# Altium PCB xc7z030_pwr.PcbDoc
Units mm, origin at the board's own origin, x right, y up, seen from the top; angles counter-clockwise.
Board outline 40.5 x 25.5 mm, 2 copper layers (Top Layer, Bottom Layer); 62 components, 35 nets, 174 pads, 191 vias.
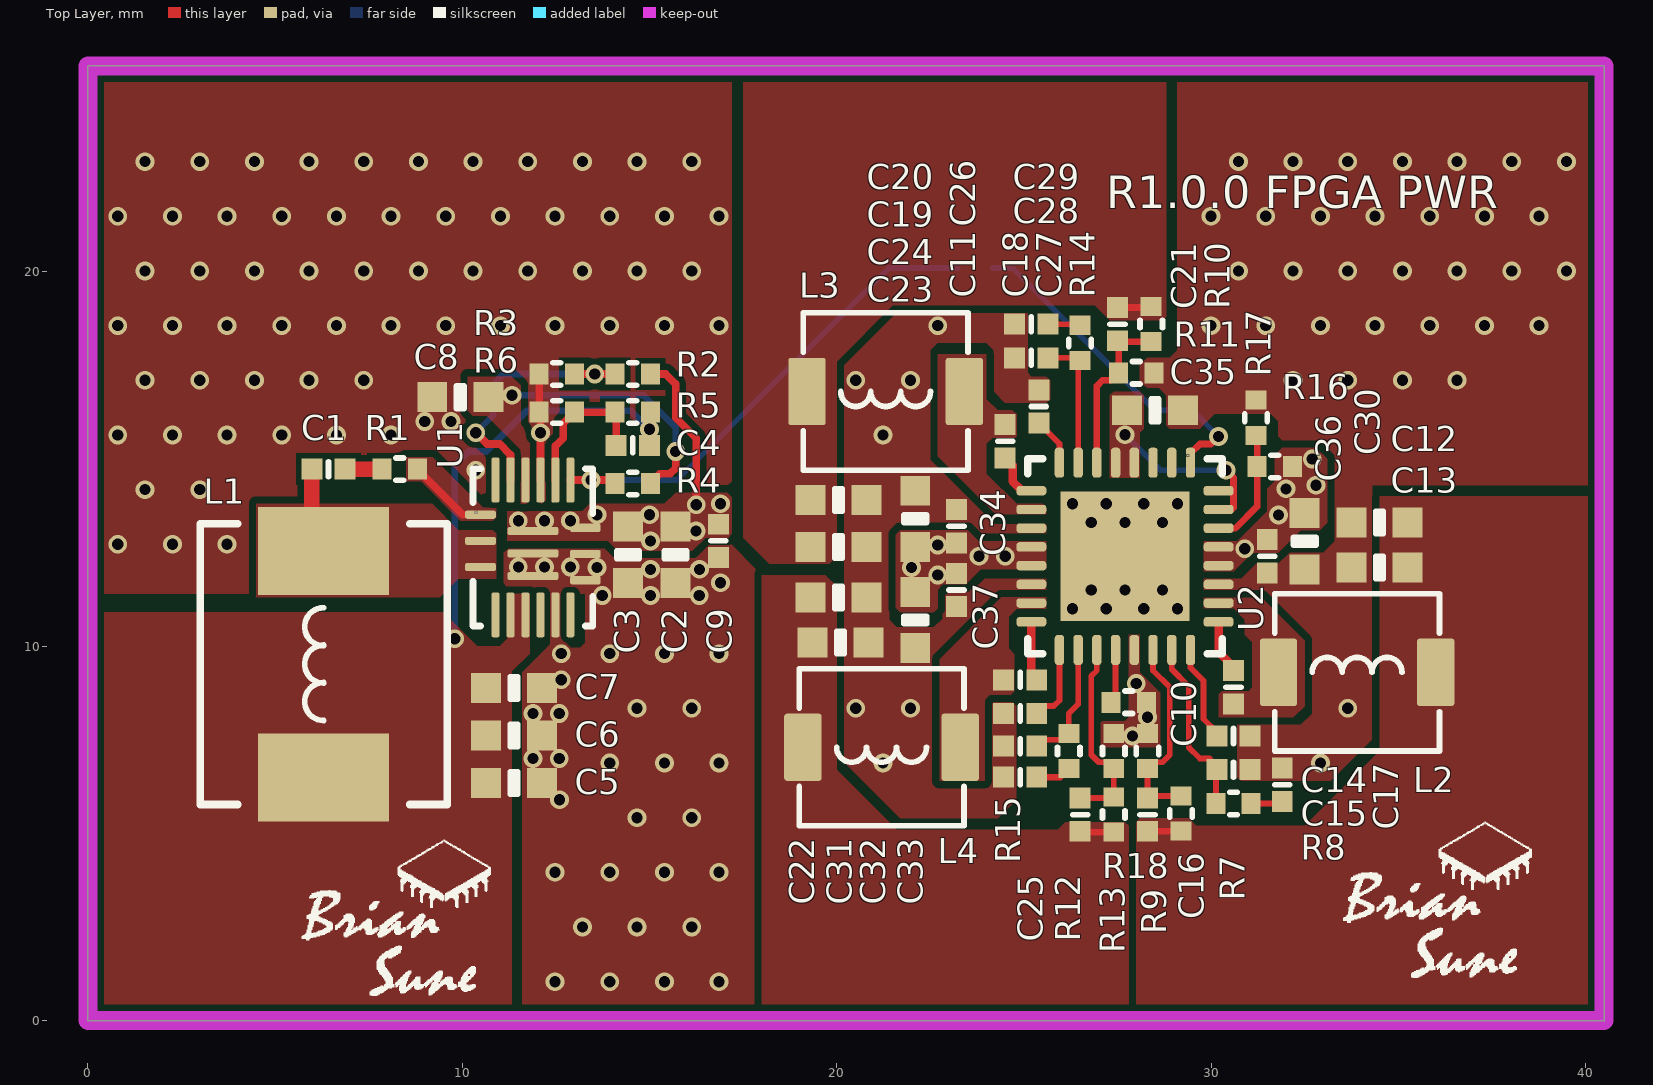
[diagram p0: Top Layer view]
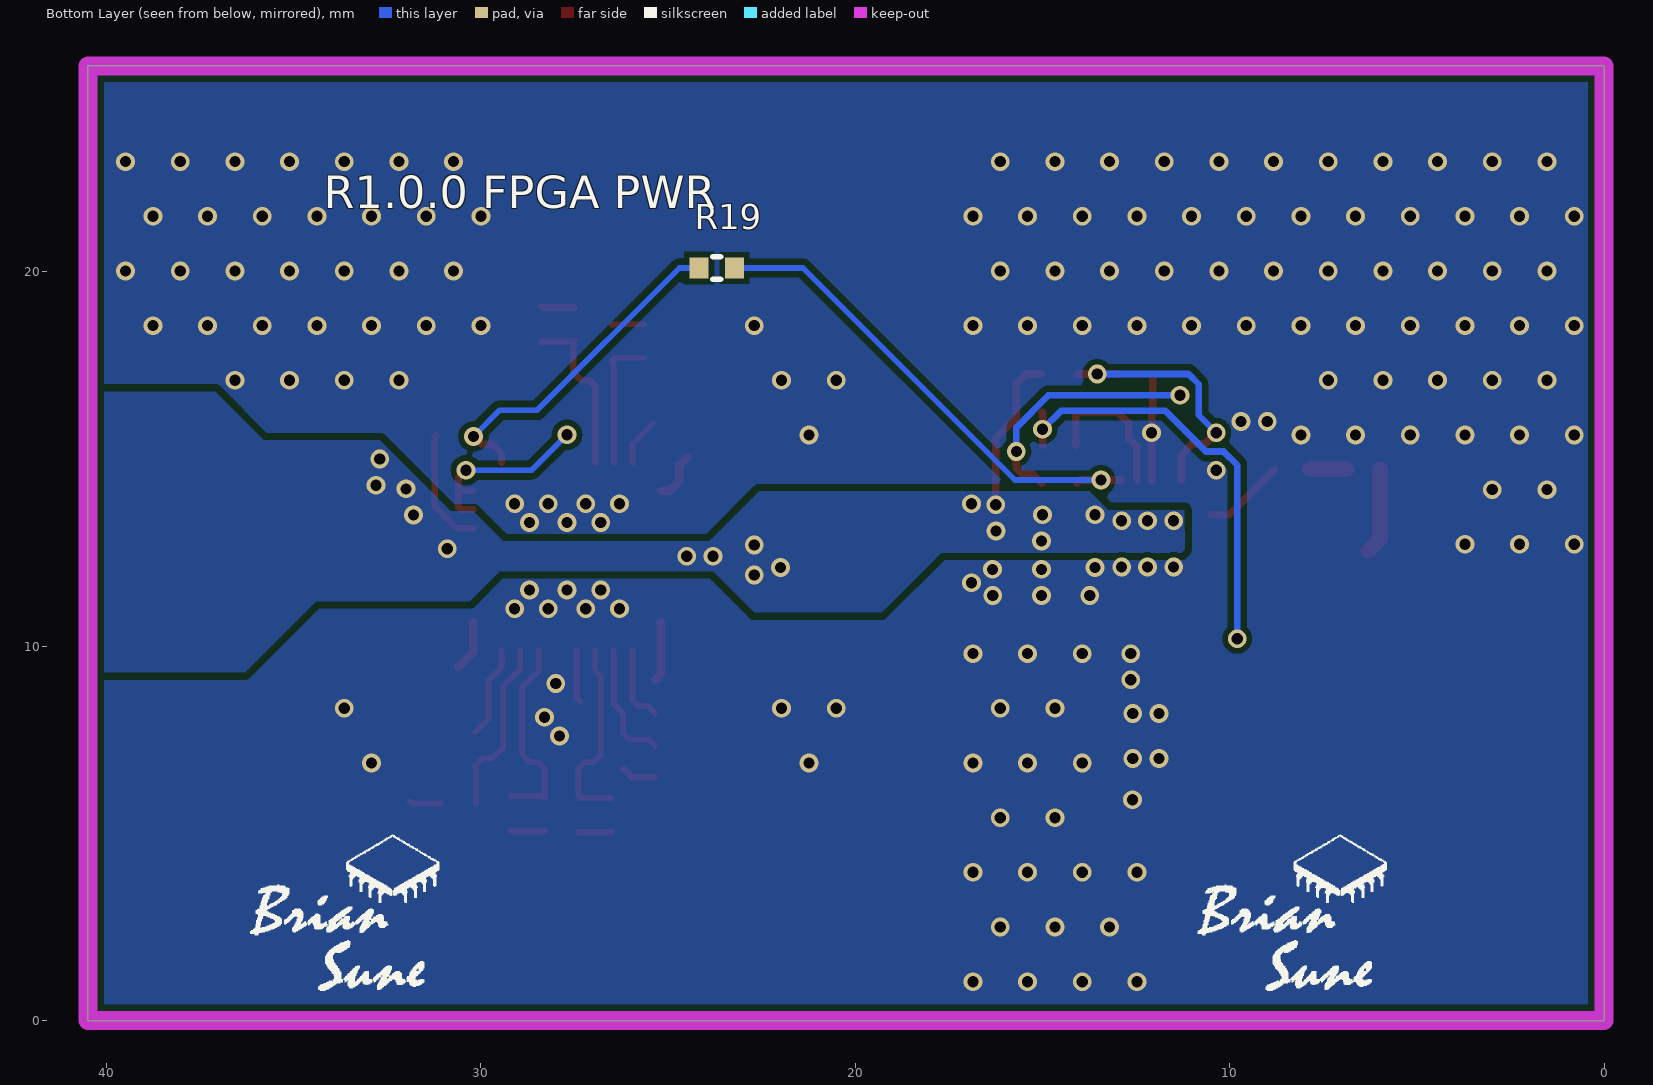
[diagram p1: Bottom Layer view, seen from below]
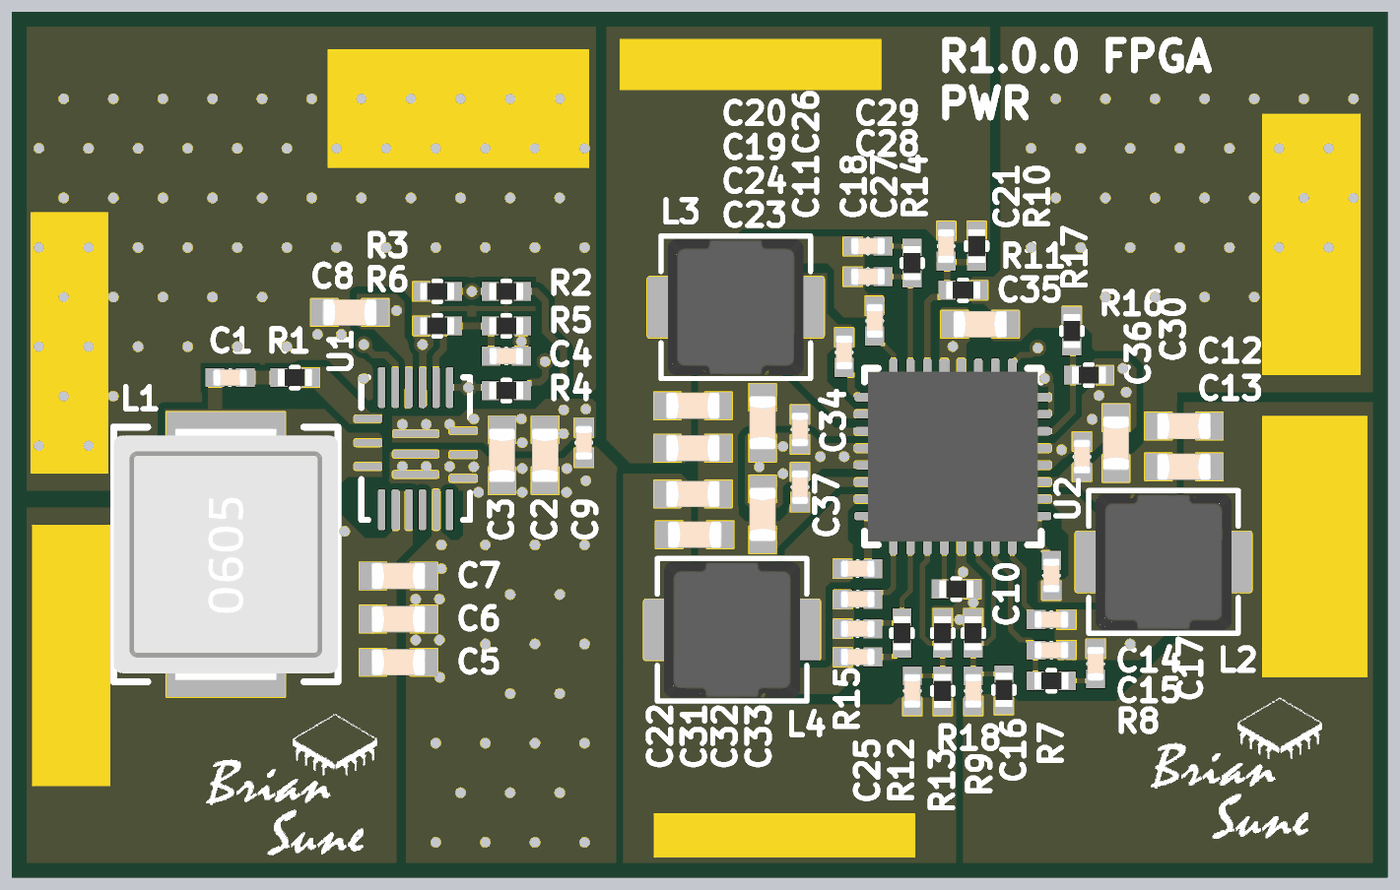
[diagram p2: 3D render of the assembled board from above, using the file's embedded part models]

## Layer stack, top to bottom
Top Solder: solder mask 0.0102, Solder Resist, Dk 3.5
Top Layer: signal copper 0.0356
Dielectric 1: dielectric 0.32, FR-4, Dk 4.8
Bottom Layer: signal copper 0.0356
Bottom Solder: solder mask 0.0102, Solder Resist, Dk 3.5

## Board outline
0,0 40.5,0 40.5,25.5 0,25.5

## Design rules (kind name [scope] priority, off if disabled: settings)
Clearance [All] p1: gap=0.152 ignorepadtopadclearanceinfootprint=FALSE except(0: Arc-Hole Track-Hole SMDPad-Hole THPad-Hole Via-Hole Fill-Hole Poly-Hole Region-Hole Text-Hole; 0.178: Arc-Poly Track-Poly; 0.203: SMDPad-Region THPad-Poly THPad-Region Fill-Poly Poly-Poly Poly-Region)
ComponentClearance [All] p1: gap=0.3 collisioncheckmode=3 verticalgap=0.3 showdistances=FALSE
DiffPairsRouting [All] p1: maxlimit=0.254 minlimit=0.152 mostfreqgap=0.203 toplayer_minwidth=0.152 toplayer_maxwidth=0.381 toplayer_prefwidth=0.203 bottomlayer_minwidth=0.152 bottomlayer_maxwidth=0.381 bottomlayer_prefwidth=0.203 maxuncoupledlength=12.7
Height [All] p1: minheight=0 maxheight=40 prefheight=12.7
HoleSize [All] p1: absolutevalues=TRUE maxlimit=6 minlimit=0.025 maxpercent=80.000 minpercent=20.000
HoleToHoleClearance [All] p1: gap=0.076 allowstackedmicrovias=TRUE
MinimumSolderMaskSliver [All] p1: minsoldermaskwidth=0.025
PlaneConnect [All] p1: planeconnectstyle=Direct reliefexpansion=0.508 reliefentries=4 reliefconductorwidth=0.254 reliefairgap=0.254
PolygonConnect [All] p1: connectstyle=Direct reliefconductorwidth=0.305 reliefentries=4 polygonreliefangle="90 Angle" airgapwidth=0.305
RoutingVias [All] p1: holewidth=0.4 width=0.6 viastyle="Through Hole" minholewidth=0.3 minwidth=0.5 maxholewidth=2.8 maxwidth=3
SilkToSilkClearance [All] p1: silktosilkclearance=0.076
SilkToSolderMaskClearance [IsPad] p1: minsilkscreentomaskgap=0.025 clearancetoexposedcopper=TRUE
SolderMaskExpansion [All] p1: expansion=0.025
Width [All] p1: maxlimit=1.016 minlimit=0.152 preferedwidth=0.254
21 further rules are at their usual default settings.

## Components (designator, comment, footprint, x,y, rotation, side; value= is the part's Value field where it differs from the comment)
C1 "220nF" 0402#1 6.428,14.727 r180 top
C2 "10uF" C0603 15.699,12.441 r90 top
C3 "10uF" C0603 14.429,12.441 r90 top
C4 "220pF" 0402#1 14.556,15.362 r0 top
C5 "47uF" C0603 11.381,6.345 r180 top
C6 "47uF" C0603 11.381,7.615 r180 top
C7 "47uF" C0603 11.381,8.885 r180 top
C8 "1uF" C0603 9.95,16.648 r0 top
C9 "100nF" 0402#1 16.842,12.811 r90 top
C10 "33nF" 0402#1 30.6,8.9 r270 top
C11 "10uF" C0603 22.1,10.7 r90 top
C12 "22uF" C0603 34.5,13.3 r0 top
C13 "22uF" C0603 34.5,12.1 r0 top
C14 "33nF" 0402#1 30.6,7.6 r180 top
C15 "22pF" 0402#1 30.6,6.7 r180 top
C16 "82pF" 0402#1 28.3,5.5 r270 top
C17 "3.3nF" 0402#1 31.9,6.3 r270 top
C18 "33nF" 0402#1 24.5,15.47 r90 top
C19 "22uF" C0603 20.05,12.65 r180 top
C20 "22uF" C0603 20.05,13.9 r180 top
C21 "22pF" 0402#1 27.5,18.6 r90 top
C22 "33nF" 0402#1 24.9,9.1 r180 top
C23 "22uF" C0603 20.1,10.1 r180 top
C24 "22uF" C0603 20.05,11.3 r180 top
C25 "22pF" 0402#1 26.505,5.5 r270 top
C26 "10uF" C0603 22.1,13.4 r270 top
C27 "33nF" 0402#1 25.4,16.4 r270 top
C28 "22pF" 0402#1 25.2,17.7 r0 top
C29 "2.2nF" 0402#1 25.2,18.6 r0 top
C30 "10uF" C0603 32.5,12.8 r90 top
C31 "33nF" 0402#1 24.9,8.2 r0 top
C32 "22pF" 0402#1 24.9,7.33 r0 top
C33 "2.2nF" 0402#1 24.9,6.5 r0 top
C34 "100nF" 0402#1 23.2,13.2 r90 top
C35 "1uF" C0603 28.5,16.3 r0 top
C36 "100nF" 0402#1 31.5,12.4 r270 top
C37 "100nF" 0402#1 23.2,11.5 r270 top
L1 "1uH" 0650SMD 6.301,9.52 r90 top
L2 "4u7H" 04x0SMD_P 33.9,9.3 r180 top
L3 "4u7H" 04x0SMD_P 21.309,16.8 r0 top
L4 "4u7H" 04x0SMD_P 21.2,7.3 r0 top
R1 "4R7" 0402#2 8.333,14.727 r0 top
R2 "150k" 0402#2 14.556,17.267 r180 top
R3 "20k" 0402#2 12.524,17.267 r0 top
R4 "100k" 0402#2 14.556,14.346 r180 top
R5 "13k7" 0402#2 14.556,16.251 r0 top
R6 "20k" 0402#2 12.524,16.251 r0 top
R7 "16k" 0402#2 29.2,5.53 r270 top
R8 "20k" 0402#2 30.6,5.8 r180 top
R9 "10k" 0402#2 28.3,7.2 r270 top
R10 "20k" 0402#2 28.4,18.6 r90 top
R11 "10k" 0402#2 28,17.3 r180 top
R12 "47k5" 0402#2 27.4,5.5 r270 top
R13 "10k" 0402#2 27.4,7.2 r270 top
R14 "33k2" 0402#2 26.5,18.1 r270 top
R15 "33k2" 0402#2 26.2,7.2 r90 top
R16 "73k2" 0402#2 31.7,14.8 r180 top
R17 "10k" 0402#2 31.2,16.1 r270 top
R18 "73k2" 0402#2 27.8,8.5 r0 top
R19 "0R" 0402#2 23.7,20.1 r0 bottom
U1 "MP8757GL" QFN21_3x4mm 11.889,12.636 r0 top
U2 "TPS65261" VQFN_1MM 27.7,12.4 r270 top

## Footprints (in the part's own frame and the unit in brackets; to place one, negate y for a bottom-side part, rotate by r counter-clockwise, add the part's x,y. Pads: shape width x height; smd on the part's side, far side on the other; paste and mask are expansions set on the pad)
04x0SMD_P [mm]
  rrect15% 1x1.8 smd: 1(-2.1,0) 2(2.1,0)
  silkscreen extent -2.2,-2.1 2.2,2.1, body extent -2,-2 2,2, height 1.91
0402#1 [mil]
  rect 22x22 smd: 1(-17.5,0) 2(17.5,0)
  silkscreen extent 0,-8 0,8, body extent -20,-10 20,10, height 20
0402#2 [mil]
  rect 20x22 smd: 1(-18.5,0) 2(18.5,0)
  silkscreen extent -4,-12 4,12, body extent -20,-10 20,10, height 14
0650SMD [mm]
  rect 2.35x3.5 smd: 1(-3.025,0) 2(3.025,0)
  silkscreen extent -3.75,-3.3 3.75,3.3, body extent -3.7,-3.3 3.7,3.3, height 5.05
C0603 [mm]
  rect 0.8x0.8 smd: 1(-0.75,0) 2(0.75,0)
  silkscreen extent -0.1,-0.3 0.1,0.3, body extent -0.8,-0.4 0.8,0.4, height 0.81
QFN21_3x4mm [mm]
  rrect50% 0.82x0.22 smd: 1(-1.4,0.875) 2(-1.4,0.175) 3(-1.4,-0.525) 10(1.4,-0.875) 11(1.4,-0.175) 12(1.4,0.525)
  rrect50% 0.22x1.2 smd: 4(-1,-1.8) 5(-0.6,-1.8) 6(-0.2,-1.8) 7(0.2,-1.8) 8(0.6,-1.8) 9(1,-1.8) 13(1,1.8) 14(0.6,1.8) 15(0.2,1.8) 16(-0.2,1.8) 17(-0.6,1.8) 18(-1,1.8)
  rrect50% 1.357x0.22 smd: 19(0,0.44) 20(0,-0.16) 21(0,-0.76)
  silkscreen extent -1.6,-2.1 1.6,2.1, body extent -1.5,-2 1.5,2, height 1
VQFN_1MM [mm]
  rrect65% 0.8x0.25 smd: 1(-2.5,1.75) 2(-2.5,1.25) 3(-2.5,0.75) 4(-2.5,0.25) 5(-2.5,-0.25) 6(-2.5,-0.75) 7(-2.5,-1.25) 8(-2.5,-1.75) 17(2.5,-1.75) 18(2.5,-1.25) 19(2.5,-0.75) 20(2.5,-0.25) 21(2.5,0.25) 22(2.5,0.75) 23(2.5,1.25) 24(2.5,1.75)
  rrect65% 0.25x0.8 smd: 9(-1.75,-2.5) 10(-1.25,-2.5) 11(-0.75,-2.5) 12(-0.25,-2.5) 13(0.25,-2.5) 14(0.75,-2.5) 15(1.25,-2.5) 16(1.75,-2.5) 25(1.75,2.5) 26(1.25,2.5) 27(0.75,2.5) 28(0.25,2.5) 29(-0.25,2.5) 30(-0.75,2.5) 31(-1.25,2.5) 32(-1.75,2.5)
  rect 3.45x3.45 smd: 33(0,0)
  silkscreen extent -2.6,-2.6 2.6,2.6, body extent -2.5,-2.5 2.5,2.5, height 1

## Part data
C1: library part OBEIDUN_220nF, "0402 220nF 224K  50V X7R", Mfr.=OBEIDUN, Mfr. No=224K, ComponentLink1Description=taobao, ComponentLink1URL=https://detail.tmall.com/item.htm?abbucket=11&id=610639075445&rn=c45cf579a90ea6adc9060b093ff18dcd&skuId=4463795831944&spm=a312a.7700824.w4011-22147617817.53.51a47d1eimiUpx, Price=0.03
C2 C3 C11 C26 C30: library part OUDEIBUN_10uF_50V, "OUDEIBUN / 50V 10% 106K X5R", Mfr.=OUDEIBUN, Mfr. No=106, ComponentLink1Description=taobao, ComponentLink1URL=https://detail.tmall.com/item.htm?abbucket=11&id=610884231672&rn=bfecce7903ee26d41e055cbdf2d2e6eb&spm=a1z10.3-b.w4011-22147617817.28.ed547d1efUUngR&skuId=4463564134689, Price=0.2
C4: library part OBEIDUN_220pF, "OBEIDUN 0402 221J COG 50V", Mfr.=OBEIDUN, Mfr. No=221J, ComponentLink1Description=taobao, ComponentLink1URL=https://detail.tmall.com/item.htm?_u=l10quk0k03aa&id=608895064566&spm=a1z09.2.0.0.10c82e8dL5BzWq&skuId=4453182071791, Price=0.02
C5 C6 C7: library part OUDEIBUN_47uF_6V3, "OUDEIBUN / 6V3 20% 476K X5R", Mfr.=OUDEIBUN, Mfr. No=476, ComponentLink1Description=taobao, ComponentLink1URL=https://detail.tmall.com/item.htm?abbucket=13&id=610150176421&rn=481b48c6c534cdc180661e2f6a596c7b&skuId=4296160929116&spm=a1z10.3-b.w4011-22147617817.57.14877d1eTKWJED, Price=0.3
C8 C35: library part OUDEIBUN_1uF, "0603 1UF 16V 10% 105K X5R", Mfr.=OUDEIBUN, Mfr. No=105K, ComponentLink1Description=taobao, ComponentLink1URL=https://detail.tmall.com/item.htm?abbucket=11&id=610883455002&rn=96f7b0dde361d4c3b62eb7ab1af2da05&skuId=4292434832790&spm=a1z10.3-b.w4011-22147617817.48.46817d1eD6aiZS, Price=0.03
C9 C34 C36 C37: library part OBEIDUN_100nF, "0402 100NF 104K  50V X7R", Mfr.=OBEIDUN, Mfr. No=104K, ComponentLink1Description=taobao, ComponentLink1URL=https://detail.tmall.com/item.htm?abbucket=11&id=610169377419&rn=af8cc3c313be083494688299e412f071&skuId=4460562122099&spm=a1z10.3-b.w4011-22147617817.47.43b27d1eVfSLTc, Price=0.03
C10 C14 C18 C22 C27 C31: library part OBEIDUN_33nF, "0402 33nF 333K 16V X7R", Mfr.=OBEIDUN, Mfr. No=333K, ComponentLink1Description=taobao, ComponentLink1URL=https://detail.tmall.com/item.htm?abbucket=11&id=610643367827&rn=485ffb871bba3336ec56bdf6e40ebf1b&skuId=4293224337085&spm=a1z10.3-b.w4011-22147617817.69.91e77d1e9KkI7E, Price=0.03
C12 C13 C19 C20 C23 C24: library part OUDEIBUN_22uF, "OUDEIBUN / 25V 10% 226K X5R", Mfr.=OUDEIBUN, Mfr. No=226, ComponentLink1Description=taobao, ComponentLink1URL=https://detail.tmall.com/item.htm?abbucket=11&id=610150156146&rn=59afea97bc42016507be0d5449395d39&spm=a1z10.3-b.w4011-22147617817.29.2b4e7d1e4hXUjj&skuId=4292454384286, Price=0.6
C15 C21 C25 C28 C32: library part OBEIDUN_22pF, "0402 22pF 50V 20J COG NPO", Mfr.=OBEIDUN, Mfr. No=220J, ComponentLink1Description=taobao, ComponentLink1URL=https://detail.tmall.com/item.htm?abbucket=13&id=609430597564&rn=a1c8a15a7d6b2f90e38db74694a5b856&spm=a1z10.3-b.w4011-22147617817.40.15037d1etTZYEz&skuId=4280449596223, Price=0.02
C16: library part OBEIDUN_82pF, "82pF 50V 620J COG NPO", Mfr.=OBEIDUN, Mfr. No=820J, ComponentLink1Description=taobao, ComponentLink1URL=https://detail.tmall.com/item.htm?abbucket=11&id=609672674869&rn=c1fa653a33d4336f9e9c3c352a7aff81&spm=a1z10.3-b.w4011-22147617817.32.3e3c7d1e2qr17J&skuId=4284174813108, Price=0.02
C17: library part RAINPOLE_3n3F, "RAINPOLE 0402 3.3nF 5% 50V NPO", Mfr.=RAINPOLE, Mfr. No=332J, ComponentLink1Description=taobao, ComponentLink1URL=https://detail.tmall.com/item.htm?abbucket=11&id=577480004200&rn=e81fc7a7675914d6e9f82eba46a12cbb&skuId=3986690931936&spm=a1z10.3-b-s.w4011-12364813249.37.6d9c1ed6XWLE9d, Price=0.04
C29 C33: library part RAINPOLE_2n2F, "RAINPOLE 0402 2.2nF 5% 50V NPO", Mfr.=RAINPOLE, Mfr. No=222J, ComponentLink1Description=taobao, ComponentLink1URL=https://detail.tmall.com/item.htm?abbucket=11&id=577480004200&rn=e81fc7a7675914d6e9f82eba46a12cbb&skuId=3986690931935&spm=a1z10.3-b-s.w4011-12364813249.37.6d9c1ed6XWLE9d, Price=0.04
L1: library part L0650_1UH, "WHC0650 7*7*5MM 1R0 13A 6m5Ohm", Mfr.=Yiruisen, Mfr. No=WHC0650, ComponentLink1Description=taobao, ComponentLink1URL=https://detail.tmall.com/item.htm?id=627357573507&spm=a1z0d.6639537/tb.1997196601.4.a32d7484NrXeB3&skuId=4625833335696, Price=0.27
L2 L3 L4: library part L0430_4u7H, "4.6mmx4.1mm (LxH) DCDC Inductor SMD", Mfr.=Yiruisen, Mfr. No=WNR4030_4R7, ComponentLink1Description=taobao, ComponentLink1URL=https://detail.tmall.com/item.htm?_u=210quk0k00bf&id=627418333252&spm=a1z09.2.0.0.414e2e8dD7jcDS&skuId=4626433327929, Price=0.13
R1: library part OUDEIBUN_4R7, "OUDEIBUN / 4R7 1% 1/16W", Mfr.=OUDEIBUN, ComponentLink1Description=taobao, ComponentLink1URL=https://detail.tmall.com/item.htm?abbucket=13&id=609078818699&rn=feeb7488c21e87fd67651ea25af79abc&spm=a1z10.3-b.w4011-22147617817.124.4d347d1eCJcv5w&skuId=4447048518756, Mfr. No=4R7, Price=0.02
R2: library part OUDEIBUN_150k, "OUDEIBUN / 1% 150k", Mfr.=UNIOHM, ComponentLink1Description=taobao, ComponentLink1URL=https://detail.tmall.com/item.htm?abbucket=11&id=608928061564&rn=4c37b34fc9dccdc2648173b890fd7863&spm=a1z10.3-b.w4011-22147617817.39.76cf7d1eaF9LC8&skuId=4280827589226, Mfr. No=150k, Price=0.02
R3 R6 R8 R10: library part OUDEIBUN_20k, "OUDEIBUN / 20k 1% 1/16W", Mfr.=OUDEIBUN, ComponentLink1Description=taobao, ComponentLink1URL=https://detail.tmall.com/item.htm?_u=310quk0k3cbb&id=656218957556&skuId=4912158475127&spm=a1z09.2.0.0.d5442e8dvaKsoM, Mfr. No=20k, Price=0.02
R4: library part OUDEIBUN_100k, "OUDEIBUN / 1% 100k", Mfr.=UNIOHM, ComponentLink1Description=taobao, ComponentLink1URL=https://detail.tmall.com/item.htm?abbucket=11&id=608928061564&rn=6cabffb4bef601fc6d0198b0cb480a08&spm=a1z10.3-b.w4011-22147617817.51.20d47d1eFEZrXW&skuId=4280827589222, Mfr. No=100k, Price=0.02
R5: library part OUDEIBUN_13k7, "OUDEIBUN / 13k7 1% 1/16W", Mfr.=OUDEIBUN, ComponentLink1Description=taobao, ComponentLink1URL=https://detail.tmall.com/item.htm?_u=o10quk0kf7a9&id=655765932456&spm=a1z09.2.0.0.570c2e8dmKgpe8, Mfr. No=13k7, Price=0.02
R7: library part OUDEIBUN_16k, "OUDEIBUN / 16k 1% 1/16W", Mfr.=OUDEIBUN, ComponentLink1Description=taobao, ComponentLink1URL=https://detail.tmall.com/item.htm?abbucket=11&id=608846861852&rn=f3906b9a9f5d35fbf311e7100197937b&spm=a1z10.3-b.w4011-22147617817.42.3a057d1eN8EQT2&skuId=4279728581761, Mfr. No=16k, Price=0.02
R9 R11 R13 R17: library part UNIOHM_10k, "UNIOHM / 10K 1% 1/16W", Mfr.=UNIOHM, ComponentLink1Description=taobao, ComponentLink1URL=https://item.taobao.com/item.htm?spm=a1z09.2.0.0.570c2e8dmKgpe8&id=525633713781&_u=o10quk0k26e8, Mfr. No=10k, Price=0.012
R12: library part OUDEIBUN_47k5, "OUDEIBUN / 47k5 1% 1/16W", Mfr.=OUDEIBUN, ComponentLink1Description=taobao, ComponentLink1URL=https://detail.tmall.com/item.htm?abbucket=11&id=655773044079&rn=97d9fd7d3e40aac3ec20e0e4bb97f2bb&skuId=4907496518276&spm=a1z10.3-b.w4011-22147617817.21.41507d1eL5RGRn, Mfr. No=47k5, Price=0.02
R14 R15: library part OUDEIBUN_33k2, "OUDEIBUN / 33k2 1% 1/16W", Mfr.=OUDEIBUN, ComponentLink1Description=taobao, ComponentLink1URL=https://detail.tmall.com/item.htm?_u=o10quk0kba15&id=656995123026&skuId=4912165283327&spm=a1z09.2.0.0.570c2e8dmKgpe8, Mfr. No=33k2, Price=0.02
R16 R18: library part OUDEIBUN_73k2, "OUDEIBUN / 73k2 1% 1/16W", Mfr.=OUDEIBUN, ComponentLink1Description=taobao, ComponentLink1URL=https://detail.tmall.com/item.htm?abbucket=13&id=655776124899&rn=8c2a12cdcc93de56183387e142bb2639&spm=a1z10.3-b.w4011-22147617817.19.2f467d1e18LPyu&skuId=4738672061254, Mfr. No=73k2, Price=0.02
R19: library part OUDEIBUN_0R, "OUDEIBUN / 0R 1% 1/16W", Mfr.=OUDEIBUN, ComponentLink1Description=taobao, ComponentLink1URL=https://detail.tmall.com/item.htm?abbucket=11&id=609078082053&rn=dd22835191e181ef543cf6f0827e8de3&spm=a1z10.3-b.w4011-22147617817.40.1e787d1eBkSpf5&skuId=4447040574382, Mfr. No=0R, Price=0.02
U1: "High Efficiency, 7A, 18V / Synchronous, Step-Down Converter", Mfr.="Monolithic Power Systems", Mfr. No=MP8757GL-Z, ComponentLink1Description=taobao, ComponentLink1URL=https://item.taobao.com/item.htm?id=769936282235&skuId=5276685344264&spm=a1z0d.6639537/tb.1997196601.14.a32d7484BS3swO, Price=1.09
U2: library part TPS65261RHBR, "4.5-V to 18-V Input Voltage, 3-A/2-A/2-A Output Current / Triple Synchronous Step-Down Converter", Mfr.="Texas Instruments Incorporated", ComponentLink1Description=taobao, ComponentLink1URL=https://item.taobao.com/item.htm?spm=a1z0d.6639537/tb.1997196601.4.24877484nqp7mV&id=750148428314, Mfr. No=TPS65261RHBR, Price=4.4

## Via types
v1: diameter 0.5, hole 0.3, Top Layer to Bottom Layer, tented both sides, 191 vias

## Nets (pads, with @x,y where several pads share a name; then routed paths per layer and width w, separated by ;. In a path a pad name is that pad's centre, name@x,y a point inside that pad or via, vN(x,y) a via of type N, cw(c..) or ccw(c..) an arc to the next point about the centre after c; other vN are vias at no path point)
+1V5: C12.2 C13.2 C16.2 L2.1 R7.2 | length 0.9
  Top Layer w0.178: C16.2 R7.2@29.195,5.055
+1V8: C19.2 C20.2 C21.2 L3.1 R10.2 | length 0.9
  Top Layer w0.178: C21.2 28.375,19.044 R10.2
+3V3: C23.2 C24.2 C25.2 L4.1 R12.2 | length 0.9
  Top Layer w0.178: C25.2 26.53,5.03 R12.2
+12V: C2.2 C3.2 C9.2 C11.2 C26.2 C30.2 C34.1 C36.1 C37.1 R2.1 R16.1 U1.12 U1.19 U2.12 U2.13 U2.28 U2.29 | length 4.2
  Top Layer w0.203: R2.1 15.433,17.267 15.7,17 15.7,16.1 16.248,15.552 v1(16.248,13.776)
  other v1: 22.7,11.9 22,12.1 23.8,12.4 24.5,12.4 30.9,12.6 22.7,12.7 15.026,12.811 16.242,13.076 11.5,13.35 12.2,13.35 12.889,13.35 13.6,13.511 15.001,13.511 31.8,13.5 16.9,13.8 32,14.2 32.8,14.3 32.7,15
DC1V_O: C4.2 C5.2 C6.2 C7.2 L1.1 R5.2 U1.5 U1.6 | length 11.5
  Top Layer w0.203: C4.2 v1(15.001,15.794) 15.001,16.226 R5.2
  Bottom Layer w0.178: v1(9.8,10.2) 9.8,14.835 10.165,15.2 10.638,15.2 11.722,16.283 14.511,16.283 v1(15.001,15.794)
DC1V_SW: C1.2 L1.2 U1.2 U1.3 | length 2.3
  Top Layer w0.406: C1.2 5.984,12.862 L1.2
FPGA_DC_SIDE_EN: R19.2 U2.1 | length 9.1
  Top Layer w0.178: U2.1 29.45,15.15 29.7,15.4 30,15.4 v1(30.2,15.6)
  Bottom Layer w0.152: R19.2 24.7,20.1 28.5,16.3 29.5,16.3 v1(30.2,15.6)
GND: C2.1 C3.1 C5.1 C6.1 C7.1 C8.1 C9.1 C11.1 C12.1 C13.1 C14.1 C15.1 C17.1 C19.1 C20.1 C23.1 C24.1 C26.1 C27.1 C28.1 C29.1 C30.1 C31.1 C32.1 C33.1 C34.2 C35.2 C36.2 C37.2 R3.1 R6.1 R9.1 R11.1 R13.1 R17.1 R18.2 U1.8 U1.10 U1.11 U1.15 U1.20 U1.21 U2.11 U2.14 U2.21 U2.27 U2.33 | length 2.8
  Top Layer w0.203: R3.1 R6.1 12.089,16.216 v1(12.089,15.7) U1.15
  other v1: 12.48,1.04 13.94,1.04 15.4,1.04 16.86,1.04 13.21,2.5 14.67,2.5 16.13,2.5 12.48,3.96 13.94,3.96 15.4,3.96 16.86,3.96 14.67,5.42 16.13,5.42 12.6,5.9 13.94,6.88 15.4,6.88 16.86,6.88 21.24,6.88 32.92,6.88 11.889,7 12.589,7 27.9,7.6 28.3,8.1 11.889,8.2 12.589,8.2 14.67,8.34 16.13,8.34 20.51,8.34 21.97,8.34 33.65,8.34 28,9 12.645,9.1 12.645,9.8 13.94,9.8 15.4,9.8 16.86,9.8 26.3,11 27.2,11 28.2,11 29.1,11 13.739,11.35 15.026,11.35 16.331,11.35 26.8,11.5 27.7,11.5 28.7,11.5 16.9,11.691 15.026,12.05 16.337,12.05 11.5,12.111 12.2,12.111 12.889,12.111 13.6,12.1 0.8,12.72 2.26,12.72 3.72,12.72 26.8,13.3 27.7,13.3 28.7,13.3 26.3,13.8 27.2,13.8 28.2,13.8 29.1,13.8 1.53,14.18 2.99,14.18 10.362,14.7 0.8,15.64 2.26,15.64 3.72,15.64 5.18,15.64 6.64,15.64 8.1,15.64 21.24,15.64 9,16 9.7,16 1.53,17.1 2.99,17.1 4.45,17.1 5.91,17.1 7.37,17.1 20.51,17.1 21.97,17.1 32.19,17.1 33.65,17.1 35.11,17.1 36.57,17.1 0.8,18.56 2.26,18.56 3.72,18.56 5.18,18.56 6.64,18.56 8.1,18.56 9.56,18.56 11.02,18.56 12.48,18.56 13.94,18.56 15.4,18.56 16.86,18.56 22.7,18.56 30,18.56 31.46,18.56 32.92,18.56 34.38,18.56 35.84,18.56 37.3,18.56 38.76,18.56 1.53,20.02 2.99,20.02 4.45,20.02 5.91,20.02 7.37,20.02 8.83,20.02 10.29,20.02 11.75,20.02 13.21,20.02 14.67,20.02 16.13,20.02 30.73,20.02 32.19,20.02 33.65,20.02 35.11,20.02 36.57,20.02 38.03,20.02 39.49,20.02 0.8,21.48 2.26,21.48 3.72,21.48 5.18,21.48 6.64,21.48 8.1,21.48 9.56,21.48 11.02,21.48 12.48,21.48 13.94,21.48 15.4,21.48 16.86,21.48 30,21.48 31.46,21.48 32.92,21.48 34.38,21.48 35.84,21.48 37.3,21.48 38.76,21.48 1.53,22.94 2.99,22.94 4.45,22.94 5.91,22.94 7.37,22.94 8.83,22.94 10.29,22.94 11.75,22.94 13.21,22.94 14.67,22.94 16.13,22.94 30.73,22.94 32.19,22.94 33.65,22.94 35.11,22.94 36.57,22.94 38.03,22.94 39.49,22.94
NetC1_1: C1.1 R1.1 | length 1
  Top Layer w0.406: C1.1 R1.1
NetC4_1: C4.1 R5.1 R6.2 U1.14 | length 4
  Top Layer w0.203: U1.14 12.489,15.344 12.7,15.555 12.7,15.957 R6.2 R5.1 14.112,16.226 C4.1
NetC10_1: C10.1 U2.25 | length 1.4
  Top Layer w0.229: U2.25 30.2,9.845 C10.1@30.6,9.444
NetC10_2: C10.2 L2.2 U2.26
NetC14_2: C14.2 U2.24 | length 2.5
  Top Layer w0.152: U2.24 29.45,9.424 29.8,9.074 29.8,8.056 C14.2@30.156,7.7
NetC15_2: C15.2 R8.2 U2.23 | length 4.8
  Top Layer w0.152: U2.23 28.95,9.385 29.4,8.935 29.4,7.3 29.7,7 29.956,7 30.156,6.8 30.13,6.775 R8.2
NetC16_1: C16.1 R7.1 R9.2 U2.22 | length 5.4
  Top Layer w0.152: U2.22 28.45,9.35 28.9,8.9 28.9,7.1 28.7,6.9 28.47,6.9 R9.2 28.3,6 C16.1 28.356,6 R7.1
NetC17_2: C17.2 R8.1 | length 0.9
  Top Layer w0.152: R8.1 31.845,5.8 C17.2
NetC18_1: C18.1 U2.9 | length 1.3
  Top Layer w0.229: C18.1 24.7,14.825 24.7,14.4 24.95,14.15 U2.9
NetC18_2: C18.2 L3.2 U2.10
NetC21_1: C21.1 R10.1 R11.2 U2.6 | length 4.5
  Top Layer w0.178: U2.6 26.95,16.95 27.1,17.1 27.33,17.1 R11.2 27.53,18.125 C21.1@27.525,18.13 ; C21.1 C21.1@27.525,18.13 ; R10.1 C21.1@27.525,18.13
NetC22_1: C22.1 U2.16 | length 1.6
  Top Layer w0.229: U2.16 25.2,9.245 C22.1
NetC22_2: C22.2 L4.2 U2.15
NetC25_1: C25.1 R12.1 R13.2 U2.19 | length 5.3
  Top Layer w0.152: C25.1 27.375,5.944 R12.1 R13.2 27.23,6.9 27,6.9 26.8,7.1 26.8,9.2 26.95,9.35 U2.19
NetC27_2: C27.2 U2.8 | length 1.3
  Top Layer w0.152: C27.2 25.95,15.405 U2.8
NetC28_2: C28.2 R14.2 U2.7 | length 3.6
  Top Layer w0.152: C28.2 26.43,17.7 R14.2 26.45,17.58 U2.7
NetC29_2: C29.2 R14.1 | length 0.9
  Top Layer w0.152: C29.2 26.47,18.6 R14.1
NetC31_2: C31.2 U2.17 | length 2.1
  Top Layer w0.152: C31.2 25.545,8.4 25.8,8.4 25.95,8.55 U2.17
NetC32_2: C32.2 R15.2 U2.18 | length 3.3
  Top Layer w0.152: C32.2 25.514,7.5 26.03,7.5 R15.2 26.2,8.2 26.45,8.45 U2.18
NetC33_2: C33.2 R15.1 | length 1
  Top Layer w0.178: C33.2 25.97,6.5 R15.1
NetR1_2: R1.2 U1.1 | length 2.2
  Top Layer w0.203: R1.2 10.019,13.511 U1.1
NetR2_2: R2.2 R3.2 U1.17 | length 7.3
  Top Layer w0.203: v1(10.362,15.7) 10.662,15.4 11,15.4 11.289,15.111 U1.17 ; R3.2 v1(13.54,17.267) R2.2
  Bottom Layer w0.178: v1(10.362,15.7) 10.829,16.167 10.829,16.994 11.101,17.267 v1(13.54,17.267)
NetR16_2: R16.2 R17.2 U2.30 | length 3.2
  Top Layer w0.178: U2.30 30.65,13.15 31.23,13.73 R16.2 31.23,15.6 R17.2
NetR18_1: R18.1 U2.20 | length 1.4
  Top Layer w0.152: R18.1 27.45,8.62 U2.20
PG1V: R4.2 R19.1 U1.13 | length 13.4
  Top Layer w0.203: U1.13 v1(13.443,14.436) 13.996,14.436 R4.2
  Bottom Layer w0.152: v1(13.443,14.436) 15.736,14.436 21.4,20.1 R19.1
V7V: C35.1 U2.4 U2.5 U2.31 U2.32 | length 5
  Top Layer w0.178: U2.31 30.55,13.65 30.6,13.7 30.6,14.2 ; U2.32 30.55,14.15 30.6,14.2 ; v1(30.4,14.7) 30.6,14.5 30.6,14.2
  Bottom Layer w0.152: v1(27.7,15.644) 28.644,14.7 v1(30.4,14.7)
VCC: C8.2 R4.1 U1.16 | length 6.7
  Top Layer w0.203: R4.1 15.28,14.6 15.549,14.6 15.7,14.751 v1(15.7,15.2)
  Bottom Layer w0.178: v1(11.327,16.7) 14.842,16.7 15.7,15.842 v1(15.7,15.2)
pads on no net: U1.4 U1.7 U1.9 U1.18 U2.2 U2.3

## Polygon pours and split planes (outlines as drawn)
GND on Top Layer "GND_L01_P090" (solid, remove dead copper, pour order 90): 17.2,11.4 17.2,25.5 0,25.5 0,11.4
no net on Top Layer "Top Layer-No Net" (solid, pour order 88): 0,25.4
no net on Top Layer "Top Layer-No Net 1" (solid, pour order 86): 0,25.4
GND on Top Layer "Top Layer-GND" (solid, remove dead copper, pour order 84): 12.901,9.951 13.149,9.951 13.289,10.092 13.289,11.464 13.126,11.626 11.226,11.626 11.226,12.707 13.765,12.707 14.079,12.393 16.268,12.393 16.626,12.751 17.149,12.751 17.826,12.074 17.826,0.026 11.6,0.026 11.6,9.3 12.351,10.051 12.351,11.426 12.626,11.426 12.626,10.226
+1V8 on Top Layer "+1V8_L01_P077" (solid, remove dead copper, pour order 77): 17.5,25.5 28.8,25.5 28.8,18.8 28.7,18.7 27.3,18.7 26.9,19.1 21.5,19.1 20,17.6 20,12.4 19.8,12.2 18.2,12.2 17.5,12.9
+1V5 on Top Layer "+1V5_L01_P078" (solid, remove dead copper, pour order 78): 34.5,7.2 32.5,5.2 29.6,5.2 29.4,5.4 28.1,5.4 28,5.3 28,0 40.5,0 40.5,14 34.5,14
+3V3 on Top Layer "+3V3_L01_P076" (solid, remove dead copper, pour order 76): 21.6,5.1 25.9,5.1 26.1,5.3 27.7,5.3 27.8,5.2 27.8,0 18,0 18,11.9 19.7,11.9 20,11.6 20,6.7
V7V on Top Layer "V7V_L01_P063" (solid, remove dead copper, pour order 63): 27.3,14.5 27.3,16.7 27.4,16.8 28.1,16.8 28.2,16.7 28.2,15.8 28.1,15.7 28.1,14.5
GND on Top Layer "GND_L01_P065" (solid, remove dead copper, pour order 65): 27.8,10.3 27.8,8.1 27.7,8 27.1,8 27,7.9 27,7.4 27.1,7.3 28.6,7.3 28.7,7.4 28.7,8.7 28.1,9.3 28.1,10.3
GND on Top Layer "GND_L01_P079" (solid, remove dead copper, pour order 79): 28.9,17.7 29.1,17.9 29.1,25.5 40.5,25.5 40.5,14.3 34.3,14.3 34.3,7.5 33.2,6.4 30.8,6.4 30.7,6.5 30.7,7.9 32.4,7.9 32.7,8.2 32.7,10.2 31.8,11.1 31.4,11.5 29.8,11.5 29.8,11.8 30.8,11.8 31.2,12.2 31.8,12.2 32.1,12.5 33,12.5 33.3,12.8 33.3,15.1 32.9,15.5 31.9,15.5 31.8,15.6 31.8,16 31.6,16.2 30.1,16.2 29.7,15.8 28.9,15.8 28.8,15.9 28.8,16.7 28.6,16.9 28.2,16.9 28.1,17 28.1,17.5 28.3,17.7
+12V on Top Layer "+12V_L01_P068" (solid, remove dead copper, pour order 68): 29.8,12.8 30.7,12.8 31.5,13.6 31.5,14.2 31.7,14.4 31.7,15.1 31.9,15.3 32.8,15.3 33.1,15 33.1,13.3 32.9,13.1 32.4,13.1 31.8,12.5 31.1,12.5 30.6,12 29.8,12
NetC10_2 on Top Layer "NETC10_2_L01_P067" (solid, remove dead copper, pour order 67): 29.8,11.295 29.8,11.011 30.6,11.011 30.9,10.711 30.9,10.3 31.1,10.1 31.1,8.9 31,8.8 30.2,8.8 30.2,8.1 32.2,8.1 32.5,8.4 32.5,10.15 31.355,11.295
+12V on Top Layer "+12V_L01_P069" (solid, remove dead copper, pour order 69): 22.7,11.011 22.7,11.513 22.837,11.65 23.45,11.65 23.85,12.05 25.6,12.05 25.6,12.8 23.8,12.8 23.5,13.1 21.7,13.1 21.58,12.98 21.58,11.021 21.7,10.9 22.589,10.9
NetC22_2 on Top Layer "NETC22_2_L01_P073" (solid, remove dead copper, pour order 73): 24.6,9.938 24.75,9.788 24.75,8.794 24.656,8.7 24.094,8.7 23.95,8.555 23.95,6.4 22.75,6.4 22.75,9.65 24.4,11.3 25.6,11.3 25.6,11 24.817,11 24.6,10.783
GND on Top Layer "GND_L01_P081" (solid, remove dead copper, pour order 81): 25.6,16.5 25.7,16.6 25.7,17.1 25.6,17.2 25.2,17.2 25.1,17.3 25.1,18.9 21.6,18.9 20.2,17.5 20.2,6.9 21.7,5.4 24.3,5.4 24.8,5.9 24.8,8.4 24.7,8.5 24.2,8.5 24.1,8.4 24.1,6.3 24,6.2 22.7,6.2 22.545,6.355 22.545,9.545 24.5,11.5 25.6,11.5 25.6,11.8 23.95,11.8 23.65,11.5 23.05,11.5 22.837,11.287 22.837,10.737 22.6,10.5 21.6,10.5 21.4,10.7 21.4,13.076 21.58,13.256 23.595,13.256 23.84,13.01 25.6,13.01 25.6,13.256 24.22,13.256 22.776,14.7 22.5,14.976 22.5,17.9 22.7,18.1 24,18.1 24.2,17.9 24.2,16.8 24.5,16.5
NetC18_2 on Top Layer "NETC18_2_L01_P070" (solid, remove dead copper, pour order 70): 22.7,17.8 24,17.8 24,16.6 24.3,16.3 24.696,16.3 24.805,16.19 24.805,15.605 24.77,15.57 24.17,15.57 24,15.4 24,14.606 24.805,13.8 25.6,13.8 25.6,13.525 24.25,13.525 22.7,15.075
GND on Top Layer "GND_L01_P066" (solid, remove dead copper, pour order 66): 8.7,17.2 8.7,15.644 10.249,14.095 10.631,14.477 10.631,14.934 10.2,15.365 10.2,15.846 9.95,16.096 9.95,17.2
VCC on Top Layer "VCC_L01_P064" (solid, remove dead copper, pour order 64): 10.15,17.2 10.15,16.281 10.278,16.153 10.653,16.153 11.563,15.242 11.563,13.8 11.8,13.8 11.8,15.689 11.563,15.926 11.563,16.963 11.327,17.2
NetR1_2 on Top Layer "NETR1_2_L01_P062" (solid, remove dead copper, pour order 62): 8.5,15.044 9.217,15.044 10.561,13.7 10.911,13.7 10.911,13.35 9.95,13.35 8.9,14.4 8.5,14.4
DC1V_O on Top Layer "DC1V_O_L01_P080" (solid, remove dead copper, pour order 80): 0,10.9 9.5,10.9 10.4,10 11,10 11.2,10.2 11.2,11.4 11.8,11.4 11.8,9.8 11.327,9.327 11.327,0 0,0
+12V on Top Layer "+12V_L01_P072" (solid, remove dead copper, pour order 72): 15.399,13.8 15.699,14.1 17.078,14.1 17.2,13.978 17.2,13 17.1,12.9 16.5,12.9 16.15,12.55 14.15,12.55 13.889,12.811 11.2,12.811 11.2,13.6 13.2,13.6 13.4,13.8
DC1V_SW on Top Layer "DC1V_SW_L01_P075" (solid, remove dead copper, pour order 75): 4.5,13.8 9.2,13.8 9.9,13.1 10.911,13.1 10.911,11.8 9.9,11.8 9.4,11.3 4.5,11.3
+12V on Bottom Layer "+12V_L02_P082" (solid, remove dead copper, pour order 82): 35.8,15.5 37.1,16.8 40.5,16.8 40.5,9.3 36.3,9.3 34.4,11.2 30.3,11.2 29.5,12 23.8,12 22.7,10.9 19.3,10.9 17.7,12.5 11.2,12.5 11.214,13.636 13.249,13.636 13.75,14.136 22.564,14.136 23.9,12.8 29.4,12.8 30.2,13.6 30.8,13.6 32.7,15.5
GND on Bottom Layer "GND_L02_P083" (solid, remove dead copper, pour order 83): 0,25.5 40.5,25.5 40.5,0 0,0

## Keep-outs
Keep-Out Layer:
  the board outline again, w0.508

## Silkscreen, mask and mechanical layers (free items; w line width, h text height)
Top Overlay:
  drawing of 22 lines, arcs and shapes, not listed
  text "R1.0.0 FPGA PWR" at 27.2,21.7 h0.86
Bottom Overlay:
  drawing of 22 lines, arcs and shapes, not listed
  text "R1.0.0 FPGA PWR" at 34.2,21.7 h0.86
Top Solder:
  region: 2.85,11.9 2.85,19.6 0.55,19.6 0.55,11.9
  region: 17,24.4 9.3,24.4 9.3,20.9 17,20.9
  region: 25.6,24.7 17.9,24.7 17.9,23.2 25.6,23.2
  region: 39.7,14.8 39.7,22.5 36.8,22.5 36.8,14.8
  region: 39.9,5.9 39.9,13.6 36.8,13.6 36.8,5.9
  rectangle: 18.9,0.6 26.6,1.9
  region: 2.9,2.7 2.9,10.4 0.6,10.4 0.6,2.7
Bottom Solder:
  region: 39.7,17.3 39.7,25 37.4,25 37.4,17.3
  region: 39.7,9.7 39.7,16.5 37.4,16.5 37.4,9.7
  region: 39.7,1.1 39.7,8.8 37.4,8.8 37.4,1.1

## Dimensions
3.4,5.5 to 10,18.2 on Mechanical 2
4.1,4.9 to 17.7,5.7 on Mechanical 2